# Altium PCB 100862.pcbdoc (part 2 of 3)
Units mm, origin at the board's own origin, x right, y up, seen from the top; angles counter-clockwise.
Board outline 48 x 50 mm, 4 copper layers (Top Layer, Internal Ground, Internal Power, Bottom Layer), stack 1.481 mm thick; 185 components, 111 nets, 536 pads, 346 vias.
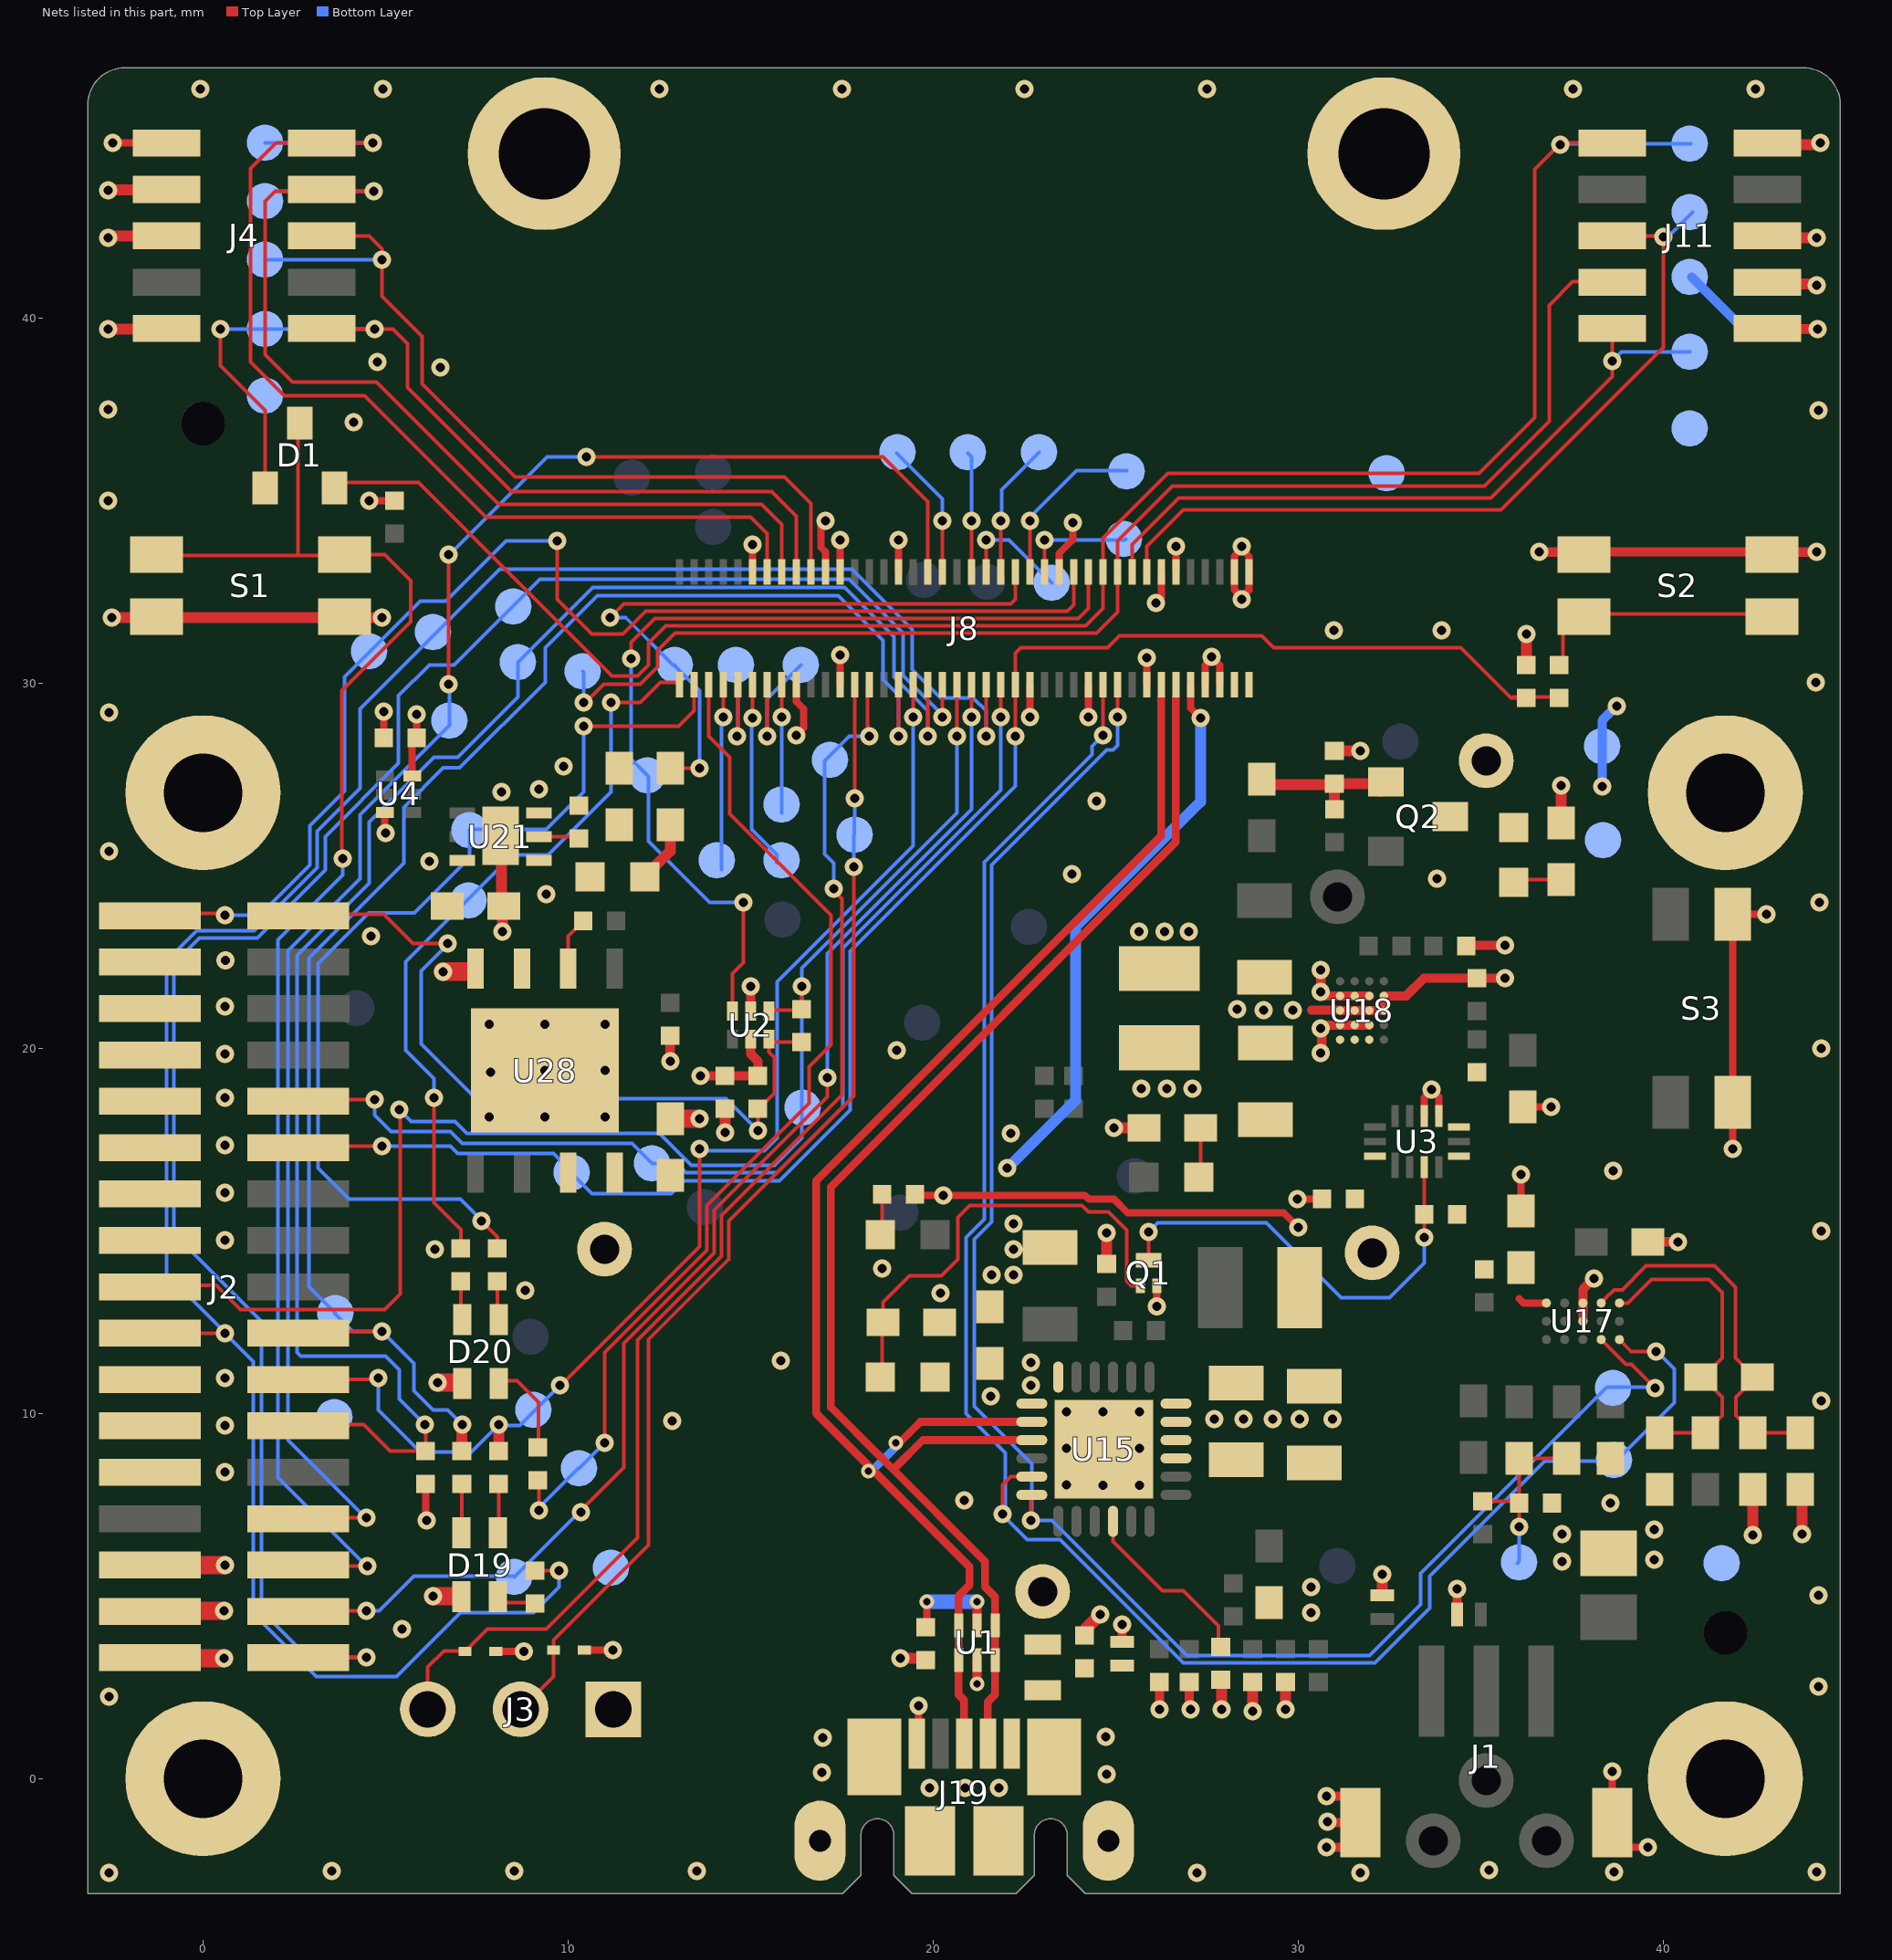
[diagram p4: the nets of this part, all layers, seen from the top]

## Via types
v1: diameter 0.5, hole 0.25, Top Layer to Bottom Layer, tented both sides, 341 vias
v2: diameter 0.4, hole 0.2, Top Layer to Bottom Layer, tented both sides, 5 vias

## Nets (pads, with @x,y where several pads share a name; then routed paths per layer and width w, separated by ;. In a path a pad name is that pad's centre, name@x,y a point inside that pad or via, vN(x,y) a via of type N, cw(c..) or ccw(c..) an arc to the next point about the centre after c; other vN are vias at no path point) (continued)
FPGA_GPIO_2: J2.28 J8.36 TP4.1 | length 47.7
  Top Layer w0.1: J2.28@2.612,7.12 2.642,7.15 v1(4.475,7.15) ; v1(6.725,29.975) v1(6.725,33.525) ; v1(10.5,36.2) 18.625,36.2 19.85,34.975 J8.36@19.85,33.04
  Bottom Layer w0.1: v1(4.475,7.15) 4.45,7.15 2.325,9.275 2.325,22.675 4.3,24.65 4.3,26.4 6.75,28.85 TP4.1@6.75,28.975 6.75,29.975 v1(6.725,29.975) ; v1(6.725,33.525) 6.75,33.525 9.425,36.2 v1(10.5,36.2)
FPGA_GPIO_3: J8.38 TP32.1 | length 3.8
  Top Layer w0.1: J8.38@20.25,33.04 v1(20.25,34.45)
  Bottom Layer w0.1: TP32.1@19,36.3 20.25,35.05 v1(20.25,34.45)
FPGA_GPIO_5: J8.42 TP35.1 | length 3.3
  Top Layer w0.1: J8.42@21.05,33.04 v1(21.05,34.45)
  Bottom Layer w0.1: TP35.1@20.95,36.3 21.05,36.2 v1(21.05,34.45)
FPGA_GPIO_6: J8.44 TP37.1 | length 3.2
  Top Layer w0.1: J8.44@21.45,33.04 v1(21.45,33.925)
  Bottom Layer w0.1: v1(21.45,33.925) 22.075,33.925 TP37.1@23.25,32.75
FPGA_GPIO_7: J8.46 TP33.1 | length 3.7
  Top Layer w0.1: J8.46@21.85,33.04 v1(21.85,34.45)
  Bottom Layer w0.1: v1(21.85,34.45) 21.875,34.475 21.875,35.3 TP33.1@22.9,36.325
FPGA_GPIO_8: J8.48 R9.2 TP38.1 | length 18.3
  Top Layer w0.1: v1(11.151,31.802) 11.524,32.175 22.125,32.175 22.25,32.3 J8.48@22.25,33.04 ; R9.2@12.8,27.675 v1(13.6,27.675)
  Bottom Layer w0.1: v1(11.151,31.802) 11.573,31.802 12.875,30.5 TP38.1@12.925,30.5 12.925,30.475 13.6,29.8 v1(13.6,27.675)
FPGA_GPIO_9: J8.50 TP34.1 | length 4.7
  Top Layer w0.1: J8.50@22.65,33.04 v1(22.65,34.45)
  Bottom Layer w0.1: v1(22.65,34.45) 22.65,34.55 23.925,35.825 TP34.1@25.3,35.825
FPGA_GPIO_10: J8.52 TP42.1 | length 3.1
  Top Layer w0.1: J8.52@23.05,33.04 v1(23.05,33.925)
  Bottom Layer w0.1: v1(23.05,33.925) 25.259,33.925 TP42.1@25.278,33.944
GND: C1.2 C2.2 C3.1 C4.2 C6.2 C7.1 C8.1 C9.2 C10.1 C52.2 C54.2 C58.2 C59.2 C60.2 C61.2 C62.2 C63.2 C64.2 C66.1 C68.2 C70.2 C71.2 C72.2 C111.1 D2.A D3.A D4.A D5.A D7.A J1.4 J1.5 J2.3 J2.5 J2.7 J2.9 J2.11 J2.13 J2.15 J2.21 J2.23 J2.25 J2.29 J3.1 J4.3 J4.5 J4.9 J8.12 J8.17 J8.23 J8.24 J8.32 J8.49 J8.54 J8.57 J8.65 J8.70 J8.73 J8.75 J8.78 J8.80 J11.3 J11.5 J11.9 J19.5 J19.6 J19.7 J19.8 J19.9 J19.10 J19.11 M1.1 M2.1 M3.1 M4.1 M5.1 M6.1 Q1.S R7.2 R13.2 R14.2 R15.2 R16.2 R71.2 R73.2 R75.2 R76.2 R77.2 R85.2 R87.2 R88.2 R92.2 R93.2 S1.1 S1.3 S2.1 S2.3 S3.1 S3.3 TP10.1 TP11.1 TP12.1 TP14.1 TP15.1 TP16.1 TP17.1 U1.2 U2.2 U3.8 U3.9 U4.3 U15.17 U15.18 U15.pad U17.C1 U17.C2 U18.B4 U18.C1 U18.C2 U18.C3 U18.C4 U21.3 U21.7 U28.4 U28.9 | length 91.6
  Top Layer w0.2: C8.1@4.95,28.5 4.95,29.15 4.885,29.215 v1(4.96,29.215) ; U4.3@4.983,26.464 4.983,25.917 v1(5,25.9) ; R16.2@6.1,8.075 6.1,7.1 v1(6.125,7.075) ; D3.A@8.02,3.486 v1(8.786,3.486) ; D2.A@10.475,3.525 v1(11.225,3.525) ; J8.12@15.05,33.04 v1(15.05,33.8) ; J8.17@16.25,29.96 16.25,29.5 16.45,29.3 16.45,28.776 v1(16.251,28.576) ; J8.23@17.45,29.96 v1@17.45,30.75 ; J8.24@17.45,33.04 v1(17.45,33.925) ; J8.32@19.05,33.04 v1(19.05,33.925) ; J19.5@19.55,0.96 19.6,1.01 v1(19.6,2) ; v1(22.65,29.075) J8.49@22.65,29.96 ; J8.54@23.45,33.04 23.45,33.55 23.825,33.925 v1(23.825,34.4) ; v1(24.25,29.075) J8.57@24.25,29.96 ; J8.65@25.85,29.96 v1(25.85,30.7) ; v1(26.125,12.938) Q1.S@26.125,13.4 ; J8.70@26.65,33.04 v1(26.65,33.75) ; J8.73@27.45,29.96 27.45,30.5 27.625,30.675 v1(27.625,30.725) 27.85,30.5 J8.75@27.85,29.96 ; v1(28.45,32.3) v1@28.45,32.361 ; v1(28.45,33.75) v1@28.413,33.713 ; v1(29.976,15.876) C7.1@30.65,15.875 C7.1@30.8,15.875 ; U3.9@33.45,18.15 33.45,18.65 33.65,18.85 v1(33.65,18.875) 33.85,18.675 U3.8@33.85,18.15 ; C63.2@36.1,15.45 v1(36.1,16.55) ; C6.2@36.15,18.4 v1(36.925,18.4) ; v1(38.6,0.2) J1.4@38.6,-1.2 38.6,-1.775 38.7,-1.875 v1(39.575,-1.875) ; v1(41.9,17.25) S3.1@41.9,18.525 S3.3@41.9,23.675 v1(42.825,23.675) ; v1(42.45,6.675) v1@42.454,6.679 ; v1@28.413,33.713 28.65,33.475 J8.80@28.65,33.04 28.65,32.55 28.461,32.361 v1@28.45,32.361 ; v1@28.413,33.713 28.413,33.638 28.25,33.475 J8.78@28.25,33.04 28.25,32.561 v1@28.45,32.361
  Top Layer w0.25: U2.2@15,21.07 v1(15,21.7) ; v2(21.2,2.6) U1.2@21.2,3.25 ; D7.A@25.175,3.75 v1(25.175,4.225) ; v1(26.2,1.9) R73.2@26.2,2.616 ; R71.2@27.016,2.65 27.016,1.838 27.054,1.876 v1(27.054,1.9) ; 30.372,21.04 31.146,21.04 U18.C1@31.148,21.037 U18.C2@31.548,21.037 U18.C3@31.948,21.037 U18.C4@32.348,21.037 U18.B4@32.348,21.437 32.962,21.437 33.44,21.915 R92.2@34.897,21.915 v1(35.672,21.915) ; v1(30.775,-1.875) J1.5@31.5,-1.875 ; v1(30.775,-0.475) J1.5@31.4,-0.475 ; v1(30.8,-1.175) 30.825,-1.2 J1.5@31.7,-1.2 J1.5@31.8,-1.2 ; D4.A@34.35,4.5 v1(34.35,5.2) ; R93.2@34.672,22.815 v1(35.672,22.815) ; S2.3@37.793,33.59 S2.1@42.943,33.59 ; U17.C2@37.8,12.523 U17.C2@37.8,12.525 U17.C1@37.8,13.025 37.8,13.4 v1(38.1,13.7)
  Top Layer w0.254: v1(36.6,33.6) 36.61,33.59 S2.3@37.793,33.59 ; C61.2@39.475,14.7 C61.2@39.575,14.7 v1(40.4,14.7) ; S2.1@42.943,33.59 44.19,33.59 v1(44.2,33.6)
  Top Layer w0.3: v1(-2.6,39.7) J4.9@-1,39.7 ; v1(-2.6,42.2) -2.56,42.24 J4.5@-1,42.24 ; v1(-2.6,43.5) -2.59,43.51 J4.3@-1,43.51 ; v1(-2.5,31.8) v1(4.9,31.8) ; U21.7@8.175,25.768 8.175,23.962 C70.2@8.247,23.89 8.2,23.843 v1(8.2,23.2) ; v1(14.3,17.7) C3.1@14.3,18.35 ; v1(19.1,3.3) 19.75,3.3 C1.2@19.8,3.25 ; C59.2@24.754,14.098 v1(24.754,14.948) ; v1(24.95,17.825) R14.2@25.557,17.825 ; R77.2@27.854,2.669 27.9,2.624 v1(27.9,1.9) ; v1(28.754,1.848) R75.2@28.754,2.6 ; v1(29.649,1.9) R76.2@29.649,2.6 ; R7.2@30.99,28.128 31.012,28.15 v1(31.7,28.15) ; D5.A@32.3,5.025 v1(32.3,5.6) ; C2.2@36.25,30.55 v1(36.25,31.35) ; R15.2@37.2,26.175 v1(37.2,27.2) ; v1@42.454,6.679 R88.2@42.454,7.925 ; J11.3@42.825,40.93 44.17,40.93 v1(44.2,40.9) ; J11.5@42.825,42.2 v1(44.2,42.2) ; J11.9@42.825,44.74 44.24,44.74 v1(44.3,44.8) ; v1(43.808,6.7) C66.1@43.808,7.925
  Top Layer w0.35: C10.1@24.2,3.925 24.2,4.125 v1(24.575,4.5)
  Top Layer w0.5: J2.29@-1.145,5.85 -1.045,5.85 -0.995,5.8 -0.945,5.85 v1(0.6,5.85) ; C111.1@12.772,18.065 v1(13.6,18.065)
  Top Layer w0.508: v1(6.575,22.1) 7.385,22.1 7.386,22.101 U28.4@7.387,22.1
  other v1: -2.575,-2.575 27.225,-2.575 31.7,-2.575 38.65,-2.55 44.2,-2.55 3.525,-2.525 8.525,-2.525 13.525,-2.525 35.225,-2.5 19.9,-0.25 20.875,-0.25 21.8,-0.25 24.75,0.125 16.95,0.175 16.975,1.125 24.725,1.15 -2.575,2.25 44.25,2.525 5.45,4.1 30.354,4.548 44.25,5.025 30.354,5.248 37.225,5.95 39.75,6 37.225,6.7 39.75,6.825 38.554,7.548 20.85,7.625 23.654,8.048 24.654,8.032 25.654,8.032 0.6,8.4 23.654,9.048 25.654,9.048 0.6,9.675 12.85,9.8 27.701,9.848 28.501,9.848 29.301,9.848 30.047,9.848 30.947,9.848 23.654,10.048 24.654,10.048 25.654,10.048 44.325,10.35 0.6,10.975 15.825,11.45 20.2,13.3 8.825,13.375 21.6,13.8 22.2,13.8 18.6,13.975 6.35,14.5 22.2,14.5 0.6,14.75 44.325,15 22.2,15.2 0.6,16.05 38.625,16.65 0.6,17.35 22.125,17.675 7.848,18.12 9.372,18.12 11.023,18.12 0.6,18.65 7.875,19.351 9.372,19.39 11.023,19.39 0.6,19.85 19,19.95 44.325,20 7.848,20.66 9.372,20.66 11.023,20.66 29.05,21.05 29.85,21.05 28.325,21.075 0.6,21.15 0.62,22.41 4.6,23.075 44.275,24 33.8,24.65 23.8,24.775 -2.575,25.4 24.475,26.775 8.175,27.025 9.2,27.1 9.875,27.725 -2.575,29.2 44.175,30.025 17.45,30.775 30.975,31.45 33.925,31.45 -2.6,35 4.125,37.15 44.25,37.475 -2.6,37.5 6.5,38.65 4.775,38.8 -0.075,46.275 4.925,46.275 12.5,46.275 17.5,46.275 22.5,46.275 27.5,46.275 37.525,46.275 42.525,46.275
MASTER_NRST: D1.3 J2.30 S1.2 S1.4 | length 42.3
  Top Layer w0.1: S1.2@-1.4,33.55 -1.345,33.544 -1.277,33.535 -1.274,33.535 -0.975,33.5 2.6,33.5 ; D1.3@2.6,36.945 2.6,33.5 ; J2.30@2.612,5.85 2.637,5.825 v1(4.5,5.825) ; v1(3.825,25.2) 3.8,25.225 3.8,29.8 5.687,31.688 5.687,32.812 4.975,33.525 S1.4@3.875,33.525 3.825,33.525 3.8,33.5 2.6,33.5
  Bottom Layer w0.1: v1(3.825,25.2) 3.825,24.75 2.05,22.975 2.05,8.25 4.475,5.825 v1(4.5,5.825)
MCU_11/FLASH_NCS: J8.58 TP61.1 U2.3 | length 25.9
  Top Layer w0.1: v1(11.725,30.675) 11.725,31.125 12.375,31.775 23.975,31.775 24.25,32.05 J8.58@24.25,33.04 ; U2.3@14.5,21.07 14.5,22.05 14.8,22.35 14.8,23.9 v1@14.7,24
  Bottom Layer w0.1: v1(11.725,30.675) 11.725,27.925 TP61.1@12.175,27.475 12.2,27.45 12.2,25.675 13.875,24 v1(14.8,24)
MCU_GPIO_1: J2.20 J8.31 R149.1 TP23.1 | length 43.8
  Top Layer w0.1: J2.20@3.025,12.24 v1(4.9,12.24) ; v1(19.05,28.55) J8.31@19.05,29.96
  Top Layer w0.3: R149.1@7.089,8.975 7.089,9.689 v1(7.1,9.7)
  Bottom Layer w0.1: TP23.1@3.612,12.738 4.11,12.24 v1(4.9,12.24) 5.775,11.365 5.775,10.625 6.3,10.1 6.7,10.1 v1(7.1,9.7) ; TP23.1@3.625,12.75 2.9,13.475 2.9,22.475 5.5,25.075 5.5,26.6 6.579,27.679 7.029,27.679 9.375,30.025 9.375,30.975 10.8,32.4 17.4,32.4 18.625,31.175 18.625,30.1 19.05,29.675 v1(19.05,28.55)
MCU_GPIO_2: J2.22 J8.33 R150.1 TP24.1 | length 34.3
  Top Layer w0.1: J2.22@2.612,10.93 4.755,10.93 v1(4.8,10.975) ; v1(9.775,10.775) 9.8,10.775 13.6,14.575 v1(13.6,17.25) ; v1(19.45,29.075) J8.33@19.45,29.96
  Top Layer w0.3: R150.1@8.1,9 v1(8.1,9.7)
  Bottom Layer w0.1: v1(4.8,10.975) 4.8,10.1 5.95,8.95 7.35,8.95 v1(8.1,9.7) 8.125,9.675 8.675,9.675 v1(9.775,10.775) ; v1(13.6,17.25) 13.65,17.2 15.375,17.2 15.725,17.55 15.725,21.825 19.45,25.55 v1(19.45,29.075)
MCU_GPIO_4: D2.C J3.2 J8.25 TP21.1 | length 31.8
  Top Layer w0.1: J3.2@8.7,1.9 9.6,2.8 9.6,3.8 12.2,6.4 12.2,12.026 14.4,14.226 14.4,15.275 17.825,18.7 v1(17.825,24.975) ; v1(17.85,26.85) 17.85,27.7 ; 17.85,27.73 J8.25@17.85,29.96 J8.25@17.85,29.985
  Bottom Layer w0.1: v1(17.825,24.975) 17.825,25.837 17.838,25.85 v1(17.85,26.85)
MCU_GPIO_5: D3.C J3.3 J8.27 TP22.1 | length 35.1
  Top Layer w0.1: J3.3@6.16,1.9 6.16,3.06 6.6,3.5 7.166,3.5 D3.C@7.18,3.486 7.794,4.1 9.4,4.1 11.9,6.6 11.9,12.009 14.2,14.309 14.2,15.425 17.5,18.725 17.5,24.1 17.275,24.325 v1(17.275,24.375) ; v1(18.25,28.55) 18.2,28.6 18.2,29.91 J8.27@18.25,29.96
  Bottom Layer w0.1: v1(17.275,24.375) 17.275,25.075 17.025,25.325 17.025,27.875 17.7,28.55 v1(18.25,28.55)
MCU_GPIO_6: J2.32 J8.41 TP28.1 | length 35.2
  Top Layer w0.1: J2.32@3.5,4.62 3.52,4.6 v1(4.475,4.6) ; v1(10.35,7.3) 10.3,7.3 11.525,8.525 11.525,11.917 14,14.392 14,15.575 17.1,18.675 v1(17.1,19.2) ; v1(21.05,29.075) J8.41@21.05,29.96
  Bottom Layer w0.1: v1(4.475,4.6) 4.825,4.6 5.775,5.55 8.5,5.55 TP28.1@8.525,5.525 10.3,7.3 v1(10.35,7.3) ; v1(17.1,19.2) 17.1,22.6 21.05,26.55 v1(21.05,29.075)
MCU_GPIO_7: J2.34 J8.37 TP29.1 | length 53.3
  Top Layer w0.1: J2.34@3.5,3.35 3.525,3.325 v1(4.475,3.325) ; v1(20.25,29.075) J8.37@20.25,29.96
  Bottom Layer w0.1: v1(4.475,3.325) 2.875,3.325 1.6,4.6 1.6,12.525 -0.8,14.925 -0.8,22.317 -0.092,23.025 1.491,23.025 3.35,24.884 3.35,25.8 5.36,27.81 5.36,29.66 6.2,30.5 6.875,30.5 9.225,32.85 17.7,32.85 19.175,31.375 19.175,30.208 20.25,29.133 v1(20.25,29.075)
MCU_GPIO_8: C2.1 J2.12 J8.47 R1.1 TP30.1 | length 46.7
  Top Layer w0.1: J2.12@3.025,17.32 v1(4.9,17.32) ; v1(22.25,28.55) J8.47@22.25,29.96 22.25,30.825 22.4,30.975 24.775,30.975 25.1,31.3 29,31.3 29.325,30.975 34.45,30.975 35.825,29.6 C2.1@36.25,29.6 ; 35.875,29.625 36.95,29.625 R1.1@36.95,29.7
  Bottom Layer w0.1: v1(4.9,17.32) 6.78,17.32 6.975,17.125 9.6,17.125 10.1,16.625 TP30.1@10.1,16.6 10.1,16.575 10.65,16.025 12.825,16.025 13.175,16.375 15.791,16.375 17.725,18.309 17.725,22.659 22.25,27.184 v1(22.25,28.55)
MCU_GPIO_9: J2.10 J8.45 TP31.1 | length 29.7
  Top Layer w0.1: J2.10@3.035,18.6 J2.10@3.51,18.6 ; J2.10@3.5,18.59 J2.10@3.51,18.6 ; v1(4.7,18.6) J2.10@3.51,18.6 ; v1(21.85,29.075) J8.45@21.85,29.96
  Bottom Layer w0.1: v1(4.7,18.6) 4.7,18.175 5.15,17.725 6.775,17.725 7.1,17.4 11.75,17.4 TP31.1@12.3,16.85 12.975,16.85 13.225,16.6 15.733,16.6 17.525,18.392 17.525,22.742 21.85,27.067 v1(21.85,29.075)
MCU_GPIO_10: J2.19 J8.43 R151.1 TP60.1 | length 64.2
  Top Layer w0.1: J2.19@-0.425,12.25 -0.375,12.2 v1(0.6,12.2) ; R151.1@9.1,5.7 v1(9.75,5.7) ; v1(21.45,28.55) J8.43@21.45,29.96
  Bottom Layer w0.1: v1(9.75,5.7) 9.75,5.25 9.05,4.55 7.05,4.55 5.3,2.8 3.1,2.8 1.375,4.525 1.375,11.425 v1(0.6,12.2) 0.6,12.225 -1,13.825 -1,22.4 -0.175,23.225 1.408,23.225 3.125,24.942 3.125,25.95 4.3,27.125 4.3,29.3 8.125,33.125 17.775,33.125 19.425,31.475 19.425,30.375 20.2,29.6 21.091,29.6 21.45,29.241 v1(21.45,28.55)
MCU_GPIO_11: J2.2 R5.2 R11.2 U2.6 | length 21.2
  Top Layer w0.1: J2.2@3.025,23.67 4.955,23.67 5.75,22.875 v1(6.7,22.875) ; v1(15.2,17.75) R5.2@15.2,18.25 ; R5.2@15.2,18.35 R5.2@15.2,18.25 ; R11.2@16.4,20.15 16.375,20.175 15.575,20.175 U2.6@15.5,20.25 15.5,19.9 15.65,19.75 15.65,18.775 15.225,18.35 15.3,18.35 R5.2@15.2,18.25
  Bottom Layer w0.1: v1(6.7,22.875) 6.7,22.841 5.975,22.116 5.975,20.125 7.475,18.625 14.325,18.625 v1(15.2,17.75)
MCU_GPIO_12: J2.17 J8.39 R11.1 TP62.1 U2.1 | length 39.3
  Top Layer w0.1: J2.17@-0.5,13.51 0.365,13.51 1.025,12.85 4.975,12.85 5.4,13.275 5.4,18.175 5.55,18.325 v1(5.375,18.325) ; U2.1@15.5,21.02 15.53,21.05 16.4,21.05 R11.1@16.4,21.075 v1(16.4,21.7) ; v1(20.65,28.55) J8.39@20.65,29.96
  Bottom Layer w0.1: v1(5.375,18.325) 5.7,18 6.9,18 7.225,17.675 12.5,17.675 13.375,16.8 15.65,16.8 16.4,17.55 v1(16.4,21.7) 16.4,22.2 20.65,26.45 v1(20.65,28.55)
MCU_GPIO_13: J2.1 J8.56 TP26.1 | length 34.3
  Top Layer w0.1: J2.1@-0.63,23.7 J2.1@-0.405,23.7 ; J2.1@-0.425,23.68 J2.1@-0.405,23.7 ; v1@0.45,23.7 J2.1@-0.405,23.7 ; v1(9.7,33.9) 9.7,32.3 10.65,31.35 11.5,31.35 12.125,31.975 23.675,31.975 23.85,32.15 J8.56@23.85,33.04
  Bottom Layer w0.1: v1@0.575,23.7 v1@0.625,23.65 ; v1(0.6,23.65) v1@0.625,23.65 ; v1(9.7,33.9) 8.3,33.9 6.65,32.25 5.95,32.25 3.875,30.175 3.875,27.05 2.925,26.1 2.925,25.025 1.55,23.65 v1@0.625,23.65
MCU_GPIO_14: J2.24 J8.35 R16.1 TP27.1 | length 47.2
  Top Layer w0.1: J2.24@3.025,9.7 4.4,9.7 5.125,8.975 R16.1@6.1,8.975 6.1,9.775 6.062,9.813 6,9.75 v1@6.075,9.75 ; v1(19.85,28.55) J8.35@19.85,29.96
  Bottom Layer w0.1: v1@6.075,9.75 6.025,9.75 5.375,10.4 5.375,11.2 5,11.575 2.675,11.575 2.575,11.675 2.575,22.55 4.55,24.525 4.55,26.2 6.325,27.975 6.975,27.975 8.625,29.625 TP27.1@8.625,30.575 10.675,32.625 17.575,32.625 18.925,31.275 18.925,30.175 19.85,29.25 v1(19.85,28.55)
  other v1: 6.075,9.7
MCU_NRST: D1.2 J8.60 J11.10 TP58.1 | length 52.3
  Top Layer w0.1: D1.2@3.6,35.5 5.9,35.5 11.2,30.2 11.9,30.2 12.2,30.5 12.2,31.1 12.675,31.575 24.175,31.575 24.65,32.05 J8.60@24.65,33.04 24.65,33.975 26.425,35.75 34.95,35.75 36.475,37.275 36.475,44.075 37.15,44.75 v1(37.175,44.75) 37.215,44.79 J11.10@38.6,44.79
  Bottom Layer w0.1: v1(37.175,44.75) 37.2,44.775 TP58.1@40.725,44.775 TP58.1@40.75,44.775
MCU_SWCLK: J8.62 J11.4 TP56.1 | length 37.1
  Top Layer w0.1: v1(10.425,29.475) 10.475,29.475 10.976,29.976 11.976,29.976 12.45,30.45 12.45,30.9 12.925,31.375 24.475,31.375 25.05,31.95 J8.62@25.05,33.04 25.05,33.9 26.55,35.4 35.1,35.4 36.875,37.175 36.875,40.35 37.515,40.99 J11.4@38.6,40.99
  Bottom Layer w0.1: TP56.1@10.4,30.325 10.425,30.3 v1(10.425,29.475)
MCU_SWDIO: J8.64 J11.2 TP55.1 | length 19.4
  Top Layer w0.1: J8.64@25.45,33.04 25.45,33.8 26.725,35.075 35.275,35.075 38.6,38.4 v1(38.6,38.821) J11.2@38.6,39.71
  Bottom Layer w0.1: v1(38.6,38.821) 38.854,39.075 TP55.1@40.725,39.075
MCU_SWO: J8.66 J11.6 TP57.1 | length 22.6
  Top Layer w0.1: J8.66@25.85,33.04 25.85,33.75 26.85,34.75 35.55,34.75 40,39.2 v1(40,42.225) 39.975,42.25 J11.6@38.6,42.25
  Bottom Layer w0.1: v1(40,42.225) 40.125,42.225 TP57.1@40.8,42.9
NetC1_1: C1.1 U1.5 | length 2.7
  Top Layer w0.2: C1.1@19.8,4.15 19.831,4.181 v2(19.831,4.85)
  Top Layer w0.25: U1.5@21.2,4.2 v2(21.2,4.85)
  Bottom Layer w0.4: v2(19.831,4.85) v2(21.2,4.85)
NetC5_2: C5.2 Q2.1 R6.2 R7.1 | length 4.1
  Top Layer w0.3: C5.2@29,27.225 30.965,27.225 R7.1@30.99,27.25 ; R6.2@30.99,26.55 R7.1@30.99,27.25 ; Q2.1@32.268,27.032 32.05,27.25 R7.1@30.99,27.25
NetC71_1: C71.1 U21.2 | length 1
  Top Layer w0.1: U21.2@9.272,25.79 10.222,25.79 C71.1@10.272,25.74
NetD6_2: D6.2 R9.1 | length 1.7
  Top Layer w0.3: D6.2@12.1,24.7 12.8,25.4 R9.1@12.8,26.125
NetD8_2: D8.2 Q1.G R13.1 | length 12.4
  Top Layer w0.1: D8.2@18.6,11.1 R13.1@18.6,12.4 ; R13.1@18.625,12.5 18.625,13.05 19.35,13.775 20.225,13.775 20.675,14.225 20.675,15.375 21,15.7 24.081,15.7 24.255,15.525 24.8,15.525 25.3,15.025 25.3,13.625 25.425,13.5 Q1.G@25.675,13.5
NetD12_1: D12.1 R68.2 | length 1.3
  Top Layer w0.1: D12.1@18.6,14.85 R68.2@18.6,16 R68.2@18.6,16.1
NetD16_2: D16.2 R15.1 | length 1.3
  Top Layer w0.1: D16.2@35.9,24.55 35.975,24.625 R15.1@37.2,24.625
NetD19_2: D19.2 R149.2 | length 1.2
  Top Layer w0.1: D19.2@7.089,6.926 7.089,8 R149.2@7.189,8.1
NetD19_3: D19.3 R150.2 | length 1.2
  Top Layer w0.1: D19.3@8.1,6.915 R150.2@8.1,8.075 R150.2@8.1,8.1
NetD19_4: D19.4 R151.2 | length 1.2
  Top Layer w0.1: D19.4@8.083,4.982 8.24,4.825 8.975,4.825 9.1,4.7 R151.2@9.181,4.7
NetD20_2: D20.2 R2.2 | length 1.2
  Top Layer w0.1: R2.2@7.061,13.615 7.061,12.397 D20.2@7.083,12.376
NetD20_3: D20.3 R3.2 | length 1.2
  Top Layer w0.1: R3.2@8.062,13.615 8.062,12.397 D20.3@8.083,12.376
NetD20_4: D20.4 R4.2 | length 2.7
  Top Layer w0.1: D20.4@8.083,10.626 D20.4@8.109,10.6 ; D20.4@8.109,10.9 8.6,10.9 9.189,10.311 R4.2@9.189,9
NetD22_2: D22.2 R14.1 | length 1.6
  Top Layer w0.1: D22.2@27.329,16.473 R14.1@27.329,18.048
NetL2_1: L2.1 U18.B1 U18.B2 U18.B3 | length 2
  Top Layer w0.254: v1(30.622,22.14) v1(30.622,21.54) 30.622,21.512 30.697,21.437 U18.B1@31.148,21.437 U18.B2@31.548,21.437 U18.B3@31.948,21.437
  other v1: 25.647,23.19 26.347,23.19 27,23.2
NetL2_2: L2.2 U18.D1 U18.D2 U18.D3 | length 2.1
  Top Layer w0.254: v1(30.622,19.865) 30.647,19.89 v1@30.647,20.64 ; v1@30.672,20.637 U18.D1@31.148,20.637 U18.D2@31.548,20.637 U18.D3@31.948,20.637
  other v1: 25.7,18.9 26.4,18.9 27.1,18.9 30.622,20.54
NetR1_2: R1.2 S2.2 S2.4 | length 7
  Top Layer w0.1: R1.2@37.15,30.5 37.175,30.5 37.25,30.575 37.25,31.675 37.4,31.825 S2.4@37.825,31.825 ; S2.4@37.825,31.889 S2.2@42.943,31.889
NetR77_1: R77.1 U15.10 | length 5
  Top Layer w0.1: U15.10@24.929,7.045 24.929,6.496 26.275,5.15 26.85,5.15 27.815,4.185 27.815,3.611 R77.1@27.88,3.611
NetR82_1: R82.1 R83.1 R84.2 R85.1 TP82.1 | length 5.3
  Top Layer w0.1: R83.1@35.104,7.548 R83.1@35.054,7.598 36.004,7.598 R85.1@36.054,7.548 ; v1(36.054,6.9) R85.1@36.054,7.548 ; R84.2@37.354,8.773 R82.1@36.054,8.773 R85.1@36.054,7.548
  Bottom Layer w0.1: TP82.1@36,5.9 36.054,5.954 v1(36.054,6.9)
NetR153_2: R153.2 U28.2 | length 1.5
  Top Layer w0.1: U28.2@10.007,22.18 10.007,23.075 R153.2@10.422,23.49
NVBUS_DET: Q1.D R10.2 U3.3 | length 12.4
  Top Layer w0.1: Q1.D@25.9,14.1 Q1.D@25.9,14.2 v1(25.9,14.975) ; v1(33.45,14.825) R10.2@33.45,15.45 U3.3@33.45,16.75
  Bottom Layer w0.1: v1(25.9,14.975) 26.15,15.225 29.125,15.225 31.175,13.175 32.5,13.175 33.45,14.125 v1(33.45,14.825)
RADIO_GPIO_1: J8.1 R2.1 TP2.1 | length 20.6
  Top Layer w0.1: v1(6.325,18.65) 6.325,15.775 7.061,15.038 R2.1@7.061,14.515 ; v1(11.175,29.475) 11.975,29.475 12.525,30.025 12.985,30.025 J8.1@13.05,29.96
  Bottom Layer w0.1: v1(6.325,18.65) 6.325,19.175 5.55,19.95 5.55,22.375 8.475,25.3 9.45,25.3 11.175,27.025 v1(11.175,29.475)
RADIO_GPIO_2: J8.3 R3.1 TP43.1 | length 27
  Top Layer w0.1: v1(7.625,15.275) 8.062,14.839 R3.1@8.062,14.515 ; v1(10.425,28.825) 13.025,28.825 13.45,29.25 J8.3@13.45,29.96
  Bottom Layer w0.1: TP43.1@7.3,25.975 7.3,25.225 5.787,23.713 4.537,23.713 3.15,22.325 3.15,16.725 4,15.875 7.05,15.875 7.625,15.3 v1(7.625,15.275) ; TP43.1@7.3,25.994 9.4,25.994 10.425,27.019 v1(10.425,28.825)
RADIO_GPIO_3: J8.5 R4.1 TP44.1 | length 28.1
  Top Layer w0.1: R4.1@9.189,8.075 9.2,8.065 v1(9.2,7.35) ; v1(11,9.2) 11,11.675 13.8,14.475 13.8,15.7 16.6,18.5 16.6,19.5 17.2,20.1 17.2,23.65 14.425,26.425 14.425,27.975 13.85,28.55 13.85,28.834 J8.5@13.85,29.96
  Bottom Layer w0.1: v1(9.2,7.35) 9.2,7.425 10.275,8.5 TP44.1@10.3,8.5 v1(11,9.2)
RADIO_GPIO_4: J8.7 TP45.1 | length 5.1
  Top Layer w0.1: v1(14.25,29.075) J8.7@14.25,29.96
  Bottom Layer w0.1: TP45.1@14.2,24.9 14.2,29.065 v1@14.21,29.075
RADIO_GPIO_5: J8.9 TP46.1 | length 3.1
  Top Layer w0.1: v1(14.625,28.55) 14.65,28.575 J8.9@14.65,29.96
  Bottom Layer w0.1: TP46.1@14.6,30.15 14.65,30.1 14.65,28.575 v1(14.625,28.55)
RADIO_GPIO_6: J8.11 TP47.1 | length 5.2
  Top Layer w0.1: v1(15.05,29.05) J8.11@15.05,29.96
  Bottom Layer w0.1: v1@15.025,29.05 15.025,26 15.713,25.312 TP47.1@15.713,25.087
RADIO_GPIO_7: J8.13 TP48.1 | length 3.7
  Top Layer w0.1: v1(15.45,28.55) J8.13@15.45,29.96
  Bottom Layer w0.1: v1(15.45,28.55) 15.45,29.575 TP48.1@16.375,30.5
RADIO_GPIO_8: J8.15 TP49.1 | length 3.5
  Top Layer w0.1: v1(15.85,29.075) J8.15@15.85,29.96
  Bottom Layer w0.1: TP49.1@15.85,26.45 TP49.1@15.85,26.675 v1(15.85,29.075)
RADIO_NRST: D1.1 J4.10 J8.18 TP53.1 | length 26.4
  Top Layer w0.1: v1(0.475,39.7) 0.475,38.7 1.7,37.475 1.7,35.6 D1.1@1.6,35.5 ; J4.10@3.25,39.7 v1(4.7,39.7) 5.2,39.7 5.6,39.3 5.6,38.1 8.45,35.25 15.575,35.25 16.25,34.575 J8.18@16.25,33.04
  Bottom Layer w0.1: v1(0.475,39.7) 0.475,39.625 0.55,39.7 TP53.1@1.7,39.7 v1(4.7,39.7)
RADIO_SWCLK: J4.4 J8.16 TP51.1 | length 27.8
  Top Layer w0.1: J4.4@3.25,43.51 J4.4@3.285,43.475 ; v1(4.675,43.475) J4.4@3.285,43.475 ; J8.16@15.85,33.04 15.85,34.35 15.3,34.9 8.1,34.9 4.75,38.25 2.45,38.25 1.7,39 1.7,43.2 1.975,43.475 J4.4@3.285,43.475
  Bottom Layer w0.1: TP51.1@1.7,43.2 1.975,43.475 v1(4.675,43.475)
RADIO_SWDIO: J4.2 J8.14 TP50.1 | length 29.1
  Top Layer w0.1: J4.2@3.25,44.78 J4.2@3.27,44.8 ; v1(4.65,44.8) J4.2@3.27,44.8 ; J8.14@15.45,33.04 15.45,34.1 15,34.55 7.75,34.55 4.425,37.875 2.225,37.875 1.3,38.8 1.3,44.1 2,44.8 J4.2@3.27,44.8
  Bottom Layer w0.1: TP50.1@1.7,44.8 v1(4.65,44.8)
RADIO_SWO: J4.6 J8.20 TP52.1 | length 23
  Top Layer w0.1: J4.6@3.25,42.24 4.56,42.24 4.9,41.9 v1(4.9,41.6) 4.9,40.6 6,39.5 6,38.2 8.55,35.65 15.925,35.65 16.65,34.925 J8.20@16.65,33.04
  Bottom Layer w0.1: TP52.1@1.7,41.6 v1(4.9,41.6)
SCL: J8.59 TP79.1 U15.5 U17.A3 | length 52.6
  Top Layer w0.1: v1(21.9,7.25) 21.9,8.05 22.125,8.275 22.657,8.275 U15.5@22.679,8.298 ; J8.59@24.61,29.832 24.65,29.832 v1@24.65,28.65 ; U17.A3@38.8,12.023 39.123,11.7 v1(39.8,11.7)
  Bottom Layer w0.1: v1(24.65,28.575) 24.35,28.275 24.35,28.05 21.4,25.1 21.4,15.325 20.9,14.825 20.9,10 21.975,8.925 21.975,7.325 v1(21.9,7.25) 21.9,7.225 22.575,6.55 23.475,6.55 26.85,3.175 32.1,3.175 33.6,4.675 33.6,5.55 36.75,8.7 38.7,8.7 40.3,10.3 40.3,11.225 39.825,11.7 v1(39.8,11.7)
SDA: J8.61 TP80.1 U15.6 U17.B3 | length 50.5
  Top Layer w0.1: v1(22.679,7.073) U15.6@22.679,7.798 ; v1(25.051,29.076) 25.051,29.946 25,29.997 J8.61@25.06,30.057 ; U17.B3@38.3,12.023 38.975,11.348 39.127,11.348 v1@39.759,10.716
  Bottom Layer w0.1: v1(25.051,29.076) 25.051,28.301 24.925,28.175 24.758,28.175 21.6,25.017 21.6,15.242 21.125,14.767 21.125,10.2 22.7,8.625 22.7,7.093 v1(22.679,7.073) 23.252,7.073 26.95,3.375 31.95,3.375 33.35,4.775 33.35,5.625 38.45,10.725 39.75,10.725 v1(39.775,10.7) ; v1(39.775,10.7) 39.85,10.7 39.812,10.737 v1(39.775,10.7)
SRN: C65.2 C66.2 R88.1 U17.B1 | length 10.4
  Top Layer w0.1: U17.B1@38.3,13.025 38.435,13.158 38.435,13.174 38.649,13.388 38.88,13.388 39.532,14.04 41.401,14.04 41.982,13.459 41.982,11.525 42.401,11.107 42.468,11.107 C65.2@42.575,11 42.468,10.894 42.43,10.894 41.987,10.45 41.987,9.942 R88.1@42.454,9.475 C66.2@43.754,9.475 C66.2@43.8,9.521
SRP: C64.1 C65.1 R86.1 U17.A1 | length 9.1
  Top Layer w0.1: U17.A1@38.8,13.025 39.031,13.023 39.683,13.675 41.25,13.675 41.617,13.308 41.617,11.525 41.199,11.107 41.132,11.107 C65.1@41.025,11 41.132,10.894 41.178,10.894 41.622,10.45 41.622,9.942 R86.1@41.154,9.475 C64.1@39.854,9.475
USB_D_N: J8.69 J19.2 U1.3 U1.4 U15.3 | length 38.6
  Top Layer w0.213: 18.962,8.513 19.72,9.27 U15.3@22.704,9.27 ; J19.2@21.5,0.96 21.5,2.1 21.7,2.3 U1.3@21.7,3.25 U1.4@21.7,4.2 21.7,4.975 21.425,5.25 21.425,5.944 18.777,8.592 18.777,8.598 18.498,8.877 18.492,8.877 17.202,10.167 17.202,16.202 26.65,25.65 26.65,29.6
USB_D_P: J8.67 J19.3 U1.1 U1.6 U15.2 | length 39.6
  Top Layer w0.213: v2@19.016,9.134 19.652,9.77 U15.2@22.704,9.77 ; J19.3@20.85,0.96 20.85,2.15 20.7,2.3 U1.1@20.7,3.25 U1.6@20.7,4.2 20.7,5 21,5.3 21,5.8 16.8,10 16.8,16.369 26.248,25.817 26.248,29.6
  Bottom Layer w0.213: v2(18.225,8.425) 18.325,8.425 18.975,9.075 v2(18.975,9.2)
USB_VBUS: C52.1 D8.1 FB1.1 J8.71 TP75.1 U15.1 U15.24 | length 15.6
  Top Layer w0.2: v1@21.575,10.45 v1(21.575,10.475) ; J8.71@27.05,29.96 27.05,29.325 v1(27.325,29.05)
  Bottom Layer w0.3: v1@22.05,16.725 23.9,18.575 23.9,23.325 27.325,26.75 v1(27.325,29.05)
  other v1: 22.675,10.775 22.675,11.4 22.025,16.725
V_SYS: C4.1 C7.2 C54.1 C63.1 L1.2 R10.1 R68.1 R79.1 TP77.1 U3.5 U3.14 U15.15 U15.16 U17.E1 | length 11.7
  Top Layer w0.2: R68.1@19.5,16.1 19.625,15.975 v1(20.275,15.975) 24.159,15.975 24.264,15.87 24.955,15.87 25.325,15.5 29.6,15.5 v1(30,15.1) ; 36.05,13.15 36.177,13.023 U17.E1@36.8,13.025
V_SYS_OUT: C9.1 R8.1 U3.7 U18.E1 U18.E2 U18.E3
VBUS_IN: C10.2 D7.C FB1.2 J19.1
VCC_3V3_APP: C3.2 C72.1 C111.2 D6.1 D19.1 D20.1 J2.31 J2.33 R5.1 R152.1 TP92.1 U2.5 U21.1 U28.3 U28.7 U28.8 | length 6.9
  Top Layer w0.25: v1(13.625,19.25) C3.2@14.3,19.25 R5.1@15.2,19.25 15.2,19.65 15,19.85 U2.5@15,20.25 U2.5@15,20.3
  Top Layer w0.254: v1(12.8,19.65) R152.1@12.8,20.35 R152.1@12.8,20.4
  Top Layer w0.5: J2.33@-0.425,3.36 -0.365,3.3 v1(0.575,3.3) ; J2.31@-0.425,4.63 -0.395,4.6 v1(0.575,4.6) ; v1(6.3,5) 7.014,5 D19.1@7.04,5.025 ; v1(6.425,10.85) 7.006,10.85 D20.1@7.083,10.926
  other v1: 9.4,24.225
VCC_3V3_CORE: J4.1 J8.22 J8.68 J11.1 R12.1 TP54.1 TP59.1 | length 12.4
  Top Layer w0.2: v1(-2.475,44.8) -2.465,44.79 J4.1@-1,44.79 ; v1(4.55,35) R12.1@5.25,35 ; J8.22@17.05,33.04 17.05,33.6 16.925,33.725 16.925,34.325 v1(17.05,34.45) ; v1(26.1,32.2) 26.25,32.35 J8.68@26.25,33.04
  Top Layer w0.25: J11.1@42.85,39.71 v1@44.215,39.71
  Bottom Layer w0.25: v1(38.325,27.175) TP54.1@38.325,28.275 38.325,28.975 v1(38.725,29.375) ; TP59.1@40.775,41.125 42.2,39.7 v1(44.225,39.7)
VCC_3V6: C8.2 C70.1 D16.1 J8.77 J8.79 Q2.3 TP1.1 U4.6 U21.6 | length 1.8
  Top Layer w0.2: U4.6@5.733,27.464 5.733,28.383 C8.2@5.85,28.5 v1(5.85,29.15) v1@5.9,29.2
  other v1: 6.2,25.125
pads on no net: J4.7 J4.8 J8.2 J8.4 J8.6 J8.8 J8.10 J8.19 J8.21 J11.7 J11.8 J19.4 U3.1 U3.4 U3.6 U3.12 U4.1 U4.5 U15.12 U17.C3 U21.5

## Polygon pours and split planes (outlines as drawn)
no net on FAB_DWG (solid): -260.995,-19.029 ccw(c-261.495,-19.029) -261.495,-18.529 ccw(c-261.495,-19.029) -261.995,-19.029 ccw(c-261.495,-19.029) -261.495,-19.529 ccw(c-261.495,-19.029) -260.995,-19.029
no net on FAB_DWG (solid): -262.995,-19.029 ccw(c-263.495,-19.029) -263.495,-18.529 ccw(c-263.495,-19.029) -263.995,-19.029 ccw(c-263.495,-19.029) -263.495,-19.529 ccw(c-263.495,-19.029) -262.995,-19.029
no net on FAB_DWG (solid): -260.995,-69.029 ccw(c-261.495,-69.029) -261.495,-68.529 ccw(c-261.495,-69.029) -261.995,-69.029 ccw(c-261.495,-69.029) -261.495,-69.529 ccw(c-261.495,-69.029) -260.995,-69.029
no net on FAB_DWG (solid): -262.995,-69.029 ccw(c-263.495,-69.029) -263.495,-68.529 ccw(c-263.495,-69.029) -263.995,-69.029 ccw(c-263.495,-69.029) -263.495,-69.529 ccw(c-263.495,-69.029) -262.995,-69.029
no net on FAB_DWG (solid): -266.995,-19.029 ccw(c-267.495,-19.029) -267.495,-18.529 ccw(c-267.495,-19.029) -267.995,-19.029 ccw(c-267.495,-19.029) -267.495,-19.529 ccw(c-267.495,-19.029) -266.995,-19.029
no net on FAB_DWG (solid): -268.995,-19.029 ccw(c-269.495,-19.029) -269.495,-18.529 ccw(c-269.495,-19.029) -269.995,-19.029 ccw(c-269.495,-19.029) -269.495,-19.529 ccw(c-269.495,-19.029) -268.995,-19.029
no net on FAB_DWG (solid): -270.995,-19.029 ccw(c-271.495,-19.029) -271.495,-18.529 ccw(c-271.495,-19.029) -271.995,-19.029 ccw(c-271.495,-19.029) -271.495,-19.529 ccw(c-271.495,-19.029) -270.995,-19.029
no net on FAB_DWG (solid): -264.995,-19.029 ccw(c-265.495,-19.029) -265.495,-18.529 ccw(c-265.495,-19.029) -265.995,-19.029 ccw(c-265.495,-19.029) -265.495,-19.529 ccw(c-265.495,-19.029) -264.995,-19.029
no net on FAB_DWG (solid): -266.995,-69.029 ccw(c-267.495,-69.029) -267.495,-68.529 ccw(c-267.495,-69.029) -267.995,-69.029 ccw(c-267.495,-69.029) -267.495,-69.529 ccw(c-267.495,-69.029) -266.995,-69.029
no net on FAB_DWG (solid): -268.995,-69.029 ccw(c-269.495,-69.029) -269.495,-68.529 ccw(c-269.495,-69.029) -269.995,-69.029 ccw(c-269.495,-69.029) -269.495,-69.529 ccw(c-269.495,-69.029) -268.995,-69.029
no net on FAB_DWG (solid): -270.995,-69.029 ccw(c-271.495,-69.029) -271.495,-68.529 ccw(c-271.495,-69.029) -271.995,-69.029 ccw(c-271.495,-69.029) -271.495,-69.529 ccw(c-271.495,-69.029) -270.995,-69.029
no net on FAB_DWG (solid): -264.995,-69.029 ccw(c-265.495,-69.029) -265.495,-68.529 ccw(c-265.495,-69.029) -265.995,-69.029 ccw(c-265.495,-69.029) -265.495,-69.529 ccw(c-265.495,-69.029) -264.995,-69.029
no net on FAB_DWG (solid): -274.995,-19.029 ccw(c-275.495,-19.029) -275.495,-18.529 ccw(c-275.495,-19.029) -275.995,-19.029 ccw(c-275.495,-19.029) -275.495,-19.529 ccw(c-275.495,-19.029) -274.995,-19.029
no net on FAB_DWG (solid): -278.995,-19.029 ccw(c-279.495,-19.029) -279.495,-18.529 ccw(c-279.495,-19.029) -279.995,-19.029 ccw(c-279.495,-19.029) -279.495,-19.529 ccw(c-279.495,-19.029) -278.995,-19.029
no net on FAB_DWG (solid): -276.995,-19.029 ccw(c-277.495,-19.029) -277.495,-18.529 ccw(c-277.495,-19.029) -277.995,-19.029 ccw(c-277.495,-19.029) -277.495,-19.529 ccw(c-277.495,-19.029) -276.995,-19.029
no net on FAB_DWG (solid): -272.995,-19.029 ccw(c-273.495,-19.029) -273.495,-18.529 ccw(c-273.495,-19.029) -273.995,-19.029 ccw(c-273.495,-19.029) -273.495,-19.529 ccw(c-273.495,-19.029) -272.995,-19.029
no net on FAB_DWG (solid): -274.995,-69.029 ccw(c-275.495,-69.029) -275.495,-68.529 ccw(c-275.495,-69.029) -275.995,-69.029 ccw(c-275.495,-69.029) -275.495,-69.529 ccw(c-275.495,-69.029) -274.995,-69.029
no net on FAB_DWG (solid): -278.995,-69.029 ccw(c-279.495,-69.029) -279.495,-68.529 ccw(c-279.495,-69.029) -279.995,-69.029 ccw(c-279.495,-69.029) -279.495,-69.529 ccw(c-279.495,-69.029) -278.995,-69.029
no net on FAB_DWG (solid): -276.995,-69.029 ccw(c-277.495,-69.029) -277.495,-68.529 ccw(c-277.495,-69.029) -277.995,-69.029 ccw(c-277.495,-69.029) -277.495,-69.529 ccw(c-277.495,-69.029) -276.995,-69.029
no net on FAB_DWG (solid): -272.995,-69.029 ccw(c-273.495,-69.029) -273.495,-68.529 ccw(c-273.495,-69.029) -273.995,-69.029 ccw(c-273.495,-69.029) -273.495,-69.529 ccw(c-273.495,-69.029) -272.995,-69.029
no net on FAB_DWG (solid): -282.995,-19.029 ccw(c-283.495,-19.029) -283.495,-18.529 ccw(c-283.495,-19.029) -283.995,-19.029 ccw(c-283.495,-19.029) -283.495,-19.529 ccw(c-283.495,-19.029) -282.995,-19.029
no net on FAB_DWG (solid): -286.995,-19.029 ccw(c-287.495,-19.029) -287.495,-18.529 ccw(c-287.495,-19.029) -287.995,-19.029 ccw(c-287.495,-19.029) -287.495,-19.529 ccw(c-287.495,-19.029) -286.995,-19.029
no net on FAB_DWG (solid): -284.995,-19.029 ccw(c-285.495,-19.029) -285.495,-18.529 ccw(c-285.495,-19.029) -285.995,-19.029 ccw(c-285.495,-19.029) -285.495,-19.529 ccw(c-285.495,-19.029) -284.995,-19.029
no net on FAB_DWG (solid): -280.995,-19.029 ccw(c-281.495,-19.029) -281.495,-18.529 ccw(c-281.495,-19.029) -281.995,-19.029 ccw(c-281.495,-19.029) -281.495,-19.529 ccw(c-281.495,-19.029) -280.995,-19.029
no net on FAB_DWG (solid): -282.995,-69.029 ccw(c-283.495,-69.029) -283.495,-68.529 ccw(c-283.495,-69.029) -283.995,-69.029 ccw(c-283.495,-69.029) -283.495,-69.529 ccw(c-283.495,-69.029) -282.995,-69.029
no net on FAB_DWG (solid): -286.995,-69.029 ccw(c-287.495,-69.029) -287.495,-68.529 ccw(c-287.495,-69.029) -287.995,-69.029 ccw(c-287.495,-69.029) -287.495,-69.529 ccw(c-287.495,-69.029) -286.995,-69.029
no net on FAB_DWG (solid): -284.995,-69.029 ccw(c-285.495,-69.029) -285.495,-68.529 ccw(c-285.495,-69.029) -285.995,-69.029 ccw(c-285.495,-69.029) -285.495,-69.529 ccw(c-285.495,-69.029) -284.995,-69.029
no net on FAB_DWG (solid): -280.995,-69.029 ccw(c-281.495,-69.029) -281.495,-68.529 ccw(c-281.495,-69.029) -281.995,-69.029 ccw(c-281.495,-69.029) -281.495,-69.529 ccw(c-281.495,-69.029) -280.995,-69.029
no net on FAB_DWG (solid): -288.995,-19.029 ccw(c-289.495,-19.029) -289.495,-18.529 ccw(c-289.495,-19.029) -289.995,-19.029 ccw(c-289.495,-19.029) -289.495,-19.529 ccw(c-289.495,-19.029) -288.995,-19.029
no net on FAB_DWG (solid): -291.495,-27.029 -290.995,-25.529 -259.995,-25.529 -259.495,-27.029 -291.495,-27.029
no net on FAB_DWG (solid): -291.595,-40.529 -291.095,-39.029 -259.895,-39.029 -259.395,-40.529 -291.595,-40.529
no net on FAB_DWG (solid): -259.395,-47.529 -259.895,-49.029 -291.095,-49.029 -291.595,-47.529 -259.395,-47.529
no net on FAB_DWG (solid): -259.495,-61.029 -259.995,-62.529 -290.995,-62.529 -291.495,-61.029 -259.495,-61.029
no net on FAB_DWG (solid): -288.995,-69.029 ccw(c-289.495,-69.029) -289.495,-68.529 ccw(c-289.495,-69.029) -289.995,-69.029 ccw(c-289.495,-69.029) -289.495,-69.529 ccw(c-289.495,-69.029) -288.995,-69.029
no net on FAB_DWG (solid): -346.495,-18.529 -345.495,-22.529 -346.495,-22.029 -347.495,-22.529 -346.495,-18.529
no net on FAB_DWG (solid): -346.495,-69.529 -347.495,-65.529 -346.495,-66.029 -345.495,-65.529 -346.495,-69.529
no net on FAB_DWG (solid): 1029 vertices, not listed, extent 256.245,-134.442 397.291,-120.868
no net on FAB_DWG (solid): 89 vertices, not listed, extent 296.465,-124.634 302.884,-120.87
no net on FAB_DWG (solid): 74 vertices, not listed, extent 308.135,-127.605 315.527,-120.87
no net on FAB_DWG (solid): 83 vertices, not listed, extent 321.917,-126.37 326.822,-121.782
no net on FAB_DWG (solid): 82 vertices, not listed, extent 333.529,-125.015 339.874,-121.787
no net on ASY_DWG (solid): 1029 vertices, not listed, extent 256.245,-134.442 397.291,-120.868
no net on ASY_DWG (solid): 89 vertices, not listed, extent 296.465,-124.634 302.884,-120.87
no net on ASY_DWG (solid): 74 vertices, not listed, extent 308.135,-127.605 315.527,-120.87
no net on ASY_DWG (solid): 83 vertices, not listed, extent 321.917,-126.37 326.822,-121.782
no net on ASY_DWG (solid): 82 vertices, not listed, extent 333.529,-125.015 339.874,-121.787
no net on ASY_DWG_R (solid): 1029 vertices, not listed, extent -373.709,-134.442 -232.663,-120.868
no net on ASY_DWG_R (solid): 89 vertices, not listed, extent -279.302,-124.634 -272.882,-120.87
no net on ASY_DWG_R (solid): 74 vertices, not listed, extent -291.945,-127.605 -284.552,-120.87
no net on ASY_DWG_R (solid): 83 vertices, not listed, extent -303.239,-126.37 -298.334,-121.782
no net on ASY_DWG_R (solid): 82 vertices, not listed, extent -316.292,-125.015 -309.947,-121.787
no net on TITLEBLOCK (solid): 331 vertices, not listed, extent -51.734,-107.442 6.971,-100.822
no net on TITLEBLOCK (solid): -29.797,-101.042 -27.259,-103.36 -27.259,-101.042 -29.797,-101.042
no net on TITLEBLOCK (solid): -34.984,-101.042 -33.861,-102.251 -32.782,-101.042 -34.984,-101.042
no net on TITLEBLOCK (solid): -24.499,-102.942 -23.509,-101.142 -22.609,-102.942 -24.499,-102.942
no net on TITLEBLOCK (solid): 26 vertices, not listed, extent -19.659,-102.342 -16.959,-101.042
GND on Top Layer "GND_L01_P252" (solid, pour order 252): 40.075,5.5 36.55,5.5 36.55,8.2 37.675,8.2 37.825,8.35 37.775,8.4 37.775,8.95 40.075,8.95
GND on Top Layer "GND_L01_P248" (solid, pour order 248): -1.6,7.7 0.975,7.7 0.975,11.6 -1.6,11.6
GND on Top Layer "GND_L01_P246" (solid, pour order 246): -1.625,14.075 0.975,14.075 0.975,23.1 -1.625,23.1
VCC_3V3_APP on Top Layer "VCC_3V3_APP_L01_P224" (solid, pour order 224): 8.504,21.545 9.604,21.545 9.604,23.404 10.1,23.9 11.575,23.9 11.575,25.2 12.2,25.2 12.2,26.325 11.235,26.325 11.235,25.546 11.085,25.396 8.808,25.396 8.804,24.4 8.804,23.1 8.504,23.1
VCC_3V6 on Top Layer "VCC_3V6_L01_P222" (solid, pour order 222): 7.5,23.2 7.5,26.6 6,26.6 5.8,26.4 5.8,23.2
GND on Top Layer "GND" (solid, remove dead copper, pour order 210): 25.4,1.6 21.925,1.6 21.925,1.038 18.775,1.038 18.775,1.6 16.375,1.6 16.375,-3.825 25.4,-3.825
V_SYS on Top Layer "SENSORVCC3" (solid, remove dead copper, pour order 193): 23 vertices, not listed, extent 26.2,7.9 37.3,17.2
3V6_OUT on Top Layer "SENSORVCC3" (solid, remove dead copper, pour order 189): 33.183,25.658 33.183,26.2 28.304,26.2 27.901,25.797 27.901,22.875 30.375,22.875 30.973,22.277 30.973,21.637 32.5,21.637 32.5,23.298 33.183,23.848
VCC_3V3_APP on Top Layer "SENSORVCC3" (solid, remove dead copper, pour order 175): 12.3,17.165 9.7,17.165 9.7,13.875 10.25,13.325 11.978,13.325 13.2,14.547 13.2,16.965 12.8,16.965 12.6,17.165
BATT- on Top Layer "Bottom-No Net" (solid, pour order 155): 36.25,5.375 36.25,-1.85 37.875,-1.85 37.875,0.25 39.4,0.25 39.4,1.175 40.925,2.7 40.925,4.725 41.8,5.6 41.8,8.1 40.175,8.1 40.175,5.375
GND on Top Layer "SENSORVCC3" (solid, remove dead copper, pour order 160): 24.003,15.548 21.124,15.547 20.9,15.324 20.9,13.6 19.8,13.6 19.3,13.007 19.3,12.2 22.454,12.2 22.454,13.498 24.312,13.498 24.312,15.238
GND on Top Layer "SENSORVCC3" (solid, remove dead copper, pour order 194): 7.672,24.89 7.672,28.39 12.1,28.39 12.1,26.8 10.9,26.8 10.9,26.1 8.822,26.1 8.822,24.89
V_SYS_OUT on Top Layer "Bottom-No Net" (solid, pour order 195): 30.975,19.125 30.975,20.57 32.1,20.57 32.1,19.9 35.45,19.9 35.45,17.5 31.033,17.5 30.467,17.075 28,17.075 28,19.125
GND on Top Layer "gnd" (solid, remove dead copper, pour order 202): 30.2,22.775 27.85,22.775 27.85,19.275 30.572,19.275 30.625,22.35
NetL2_2 on Top Layer "gnd" (solid, remove dead copper, pour order 203): 24.689,20.94 24.689,19.011 25.1,18.6 27.425,18.6 27.75,18.925 27.75,20.94
NetL2_1 on Top Layer "gnd" (solid, remove dead copper, pour order 204): 24.7,21.14 24.7,23.025 25.216,23.5 27.325,23.5 27.725,23.1 27.725,21.14
GND on Top Layer "gnd" (solid, remove dead copper, pour order 205): 26.159,9.9 26.159,9.5 31.525,9.5 31.525,11.7 27.254,11.7 27.254,10.45 26.159,10.45
CHG_SW on Top Layer "c53" (solid, remove dead copper, pour order 206): 25.275,10.747 25.275,11.847 25.8,11.847 25.8,12.648 26.675,12.648 26.675,14.95 29,14.95 29,11.9 27.1,11.9 27.1,10.748
GND on Top Layer "GND" (solid, remove dead copper, pour order 114): 28.854,5.547 28.854,4.047 30.754,4.047 30.754,5.647 28.854,5.647
USB_VBUS on Top Layer "V_BUS" (solid, pour order 208): 23.6,10.093 19.9,10.093 19.9,11.8 23.5,11.8 23.6,11.7
VBUS_IN on Top Layer "VBUS" (solid, pour order 218): 21.8,3.25 21.8,1.45 21.9,1.35 21.9,0.25 22.6,0.25 22.6,1.775 25.455,1.775 25.605,1.925 25.605,3.25 24.8,3.25
BATT+ on Top Layer "BATT+_L01_P230" (solid, pour order 230): 26.1,8 26.1,6.9 27.3,5.7 30.925,5.7 30.925,1.975 31.9,1 32.575,0.325 32.575,-1.85 34,-1.85 34,4.7 31.8,4.7 31.8,6.3 31.8,7.8 28.004,7.8 27.805,8
VCC_3V6 on Top Layer "VCC_3V6_L01_P232" (solid, pour order 232): 28.1,30.7 28.1,29.225 31.575,29.225 33.325,27.475 33.325,25.25 36.75,25.25 36.75,28.375 34.425,30.7
USB_VBUS on Top Layer "USB_VBUS_L01_P250" (solid, pour order 250): 23.775,3.3 21.95,3.3 21.95,5.725 22.425,6.2 23.548,6.2 24.025,5.731 24.025,4.3 23.775,4.3
GND on Internal Power "GND_L03_P244" (solid, pour order 244): 26.7,12.8 26.7,-3.15 44.873,-3.15 44.873,24.4 34.725,24.4 34.725,12.8
V_SYS on Internal Power "V_SYS_L03_P242" (solid, pour order 242): 34.725,24.6 29.6,24.6 29.6,18.875 29.4,18.6 26.8,18.6 26.8,12.825 34.725,12.825
USB_VBUS on Internal Power "USB_VBUS_L03_P240" (solid, pour order 240): 26.7,-3.15 26.7,23.5 16.95,23.5 16.95,-3.15
VCC_3V3_APP on Internal Power "VCC_3V3_APP_L03_P238" (solid, pour order 238): -3.15,31.549 4.192,31.549 4.192,24.624 16.892,24.624 16.892,18.607 16.892,-3.15 -3.15,-3.15
VCC_3V6 on Internal Power "VCC_3V6_L03_P236" (solid, pour order 236): 4.2,29.9 4.2,24.5 17,24.5 17,23.5 31,23.5 31,24.5 36.825,24.5 36.825,31.55 4.2,31.55
VCC_3V3_CORE on Internal Power "VCC_3V3_CORE_L03_P234" (solid, pour order 234): -3.15,46.85 -3.15,31.67 36.945,31.67 36.945,24.5 44.85,24.5 44.85,46.85
NetL2_2 on Internal Power "g" (solid, remove dead copper, pour order 180): 30.972,21.015 30.972,19.44 30.472,19.44 29.603,18.57 24.772,18.57 24.772,21.015 30.747,21.015
NetL2_1 on Internal Power "g" (solid, remove dead copper, pour order 181): 30.972,22.615 30.972,21.04 30.772,21.04 30.747,21.04 28.572,21.04 27.972,21.04 24.772,21.04 24.772,23.5 29.544,23.5 30.535,22.615
GND on Internal Ground "GND_L02_P228" (solid, pour order 228): -4,48.5 -4,-3.8 -4.2,-4 -4.1,-4.1 46.5,-4.1 46.5,47.6 46,48.1 33.9,48.1 31.9,48.1 28.9,48.1 24.9,47.8 8.4,47.8 7.1,49.1 6.5,48.5 -3,48.5
GND on Bottom Layer "GND_L04_P220" (solid, remove dead copper, pour order 220): 45.641,47.375 45.6,-4.2 -3.825,-4.2 -3.825,47.375 6.375,47.375 35.1,47.375

## Other copper
Top Layer:
  text ".Layer_Name" at -24.273,-126.413 h3.5
Internal Ground:
  pour cut-out: 25.2,10.5 27.2,10.5 27.2,11.8 29.1,11.8 29.1,15.1 26.9,15.1 26.5,15.1 26.5,12.7 25.7,12.7 25.7,11.9 25.2,11.9
  pour cut-out: 24.772,23.94 24.772,18.14 28.772,18.14 28.772,19.44 28.072,19.44 28.072,22.64 28.772,22.64 28.772,23.94
  text ".Layer_Name" at -21.205,-126.649 h3.5
Internal Power:
  text ".Layer_Name" at -19.405,-126.649 h3.5
Bottom Layer:
  pour cut-out: 25.2,10.5 27.2,10.5 27.2,11.8 29.1,11.8 29.1,15.1 26.9,15.1 26.5,15.1 26.5,12.675 25.7,12.675 25.7,11.9 25.2,11.9
  pour cut-out: 24.772,23.94 24.772,18.14 28.772,18.14 28.772,19.44 28.072,19.44 28.072,22.64 28.772,22.64 28.772,23.94
  text "601-'.Board_Number'-R'.PCB_Revision'" at 42.525,8.075 h1.2 r270
  text ".Layer_Name" at -29.688,-126.08 h3.5